# EAGLE board master (EAGLE 8.4.0)
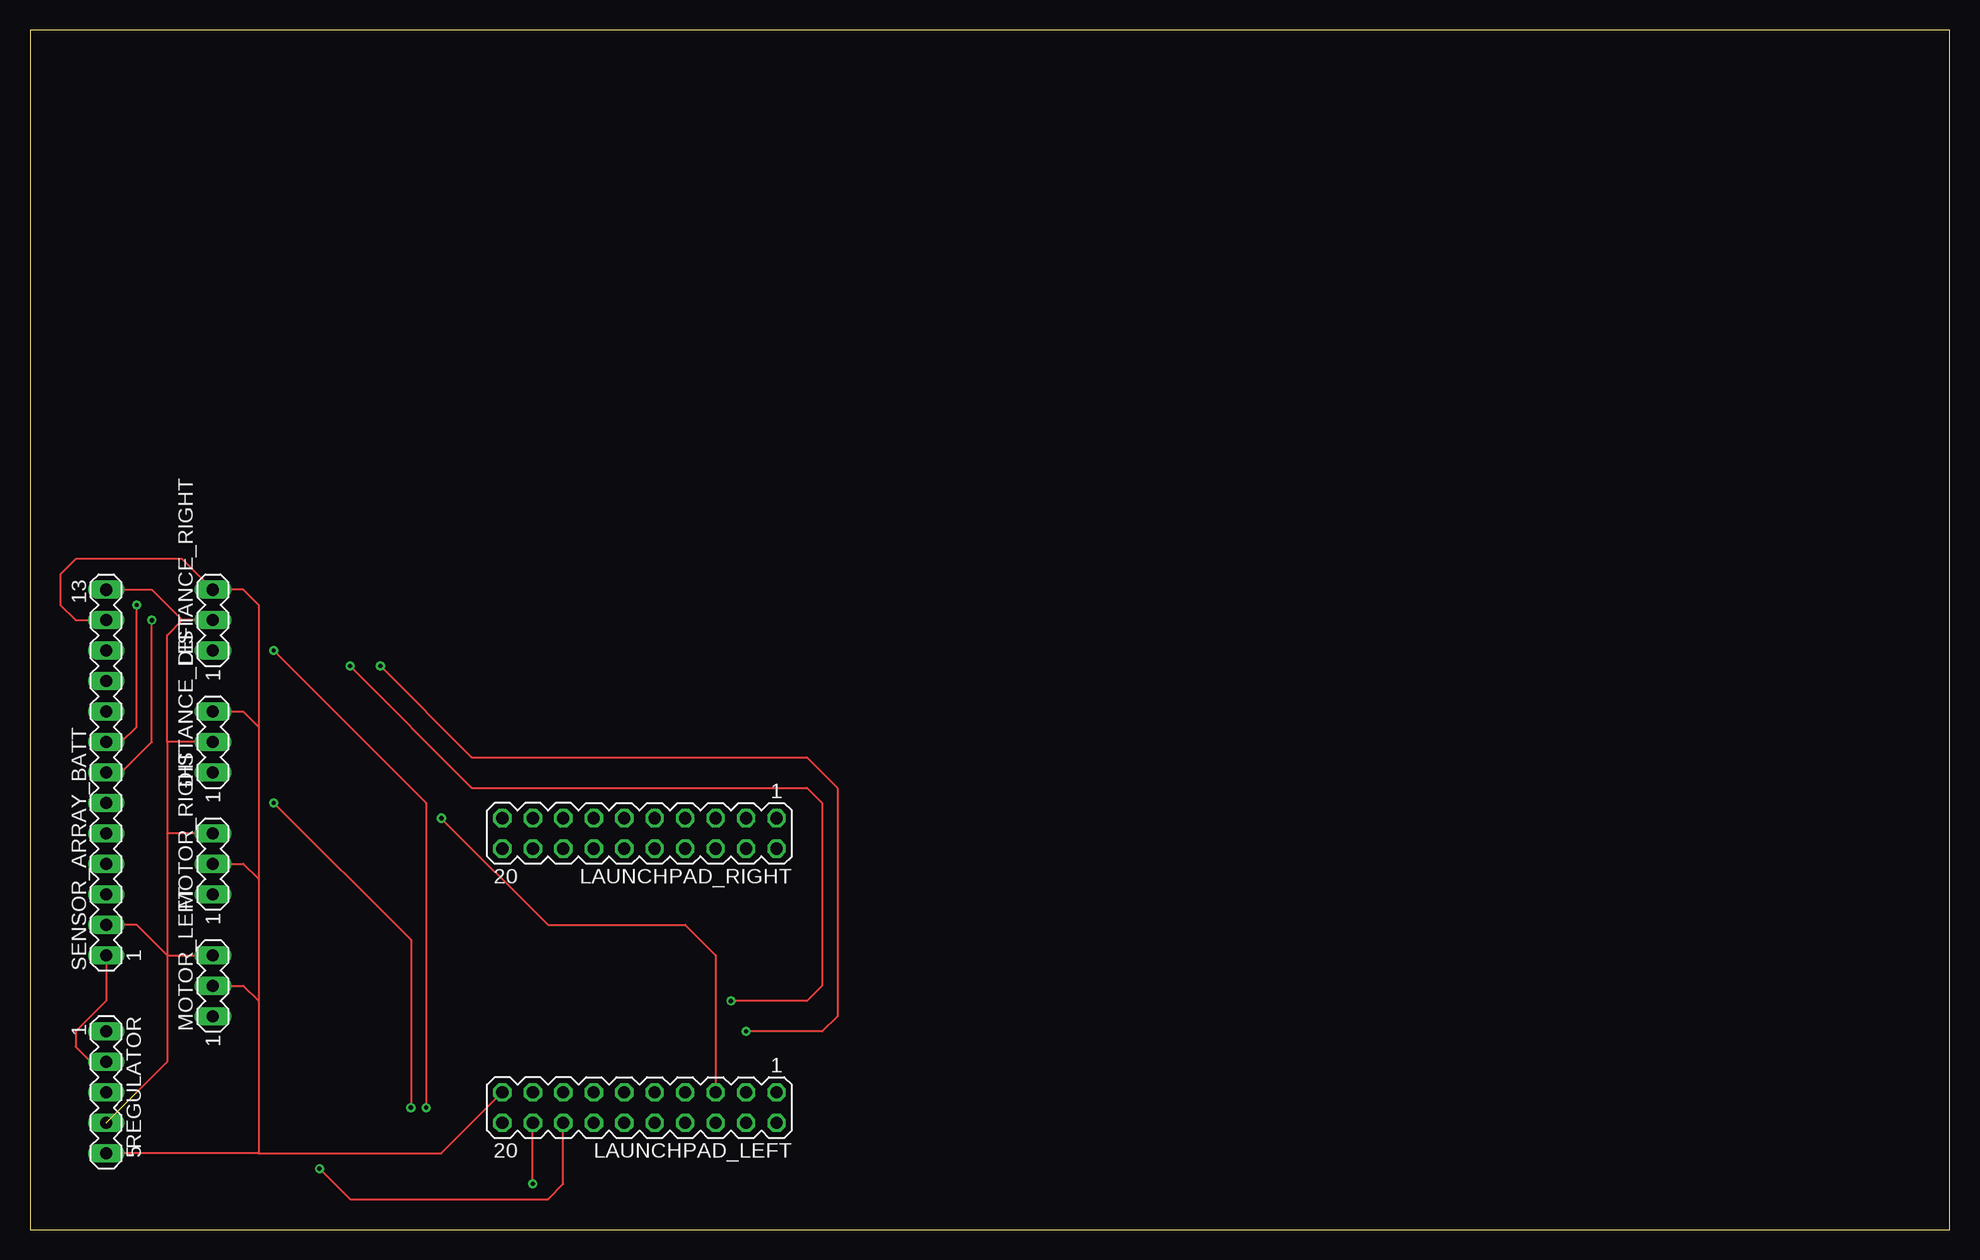
[diagram p0: board, top side]
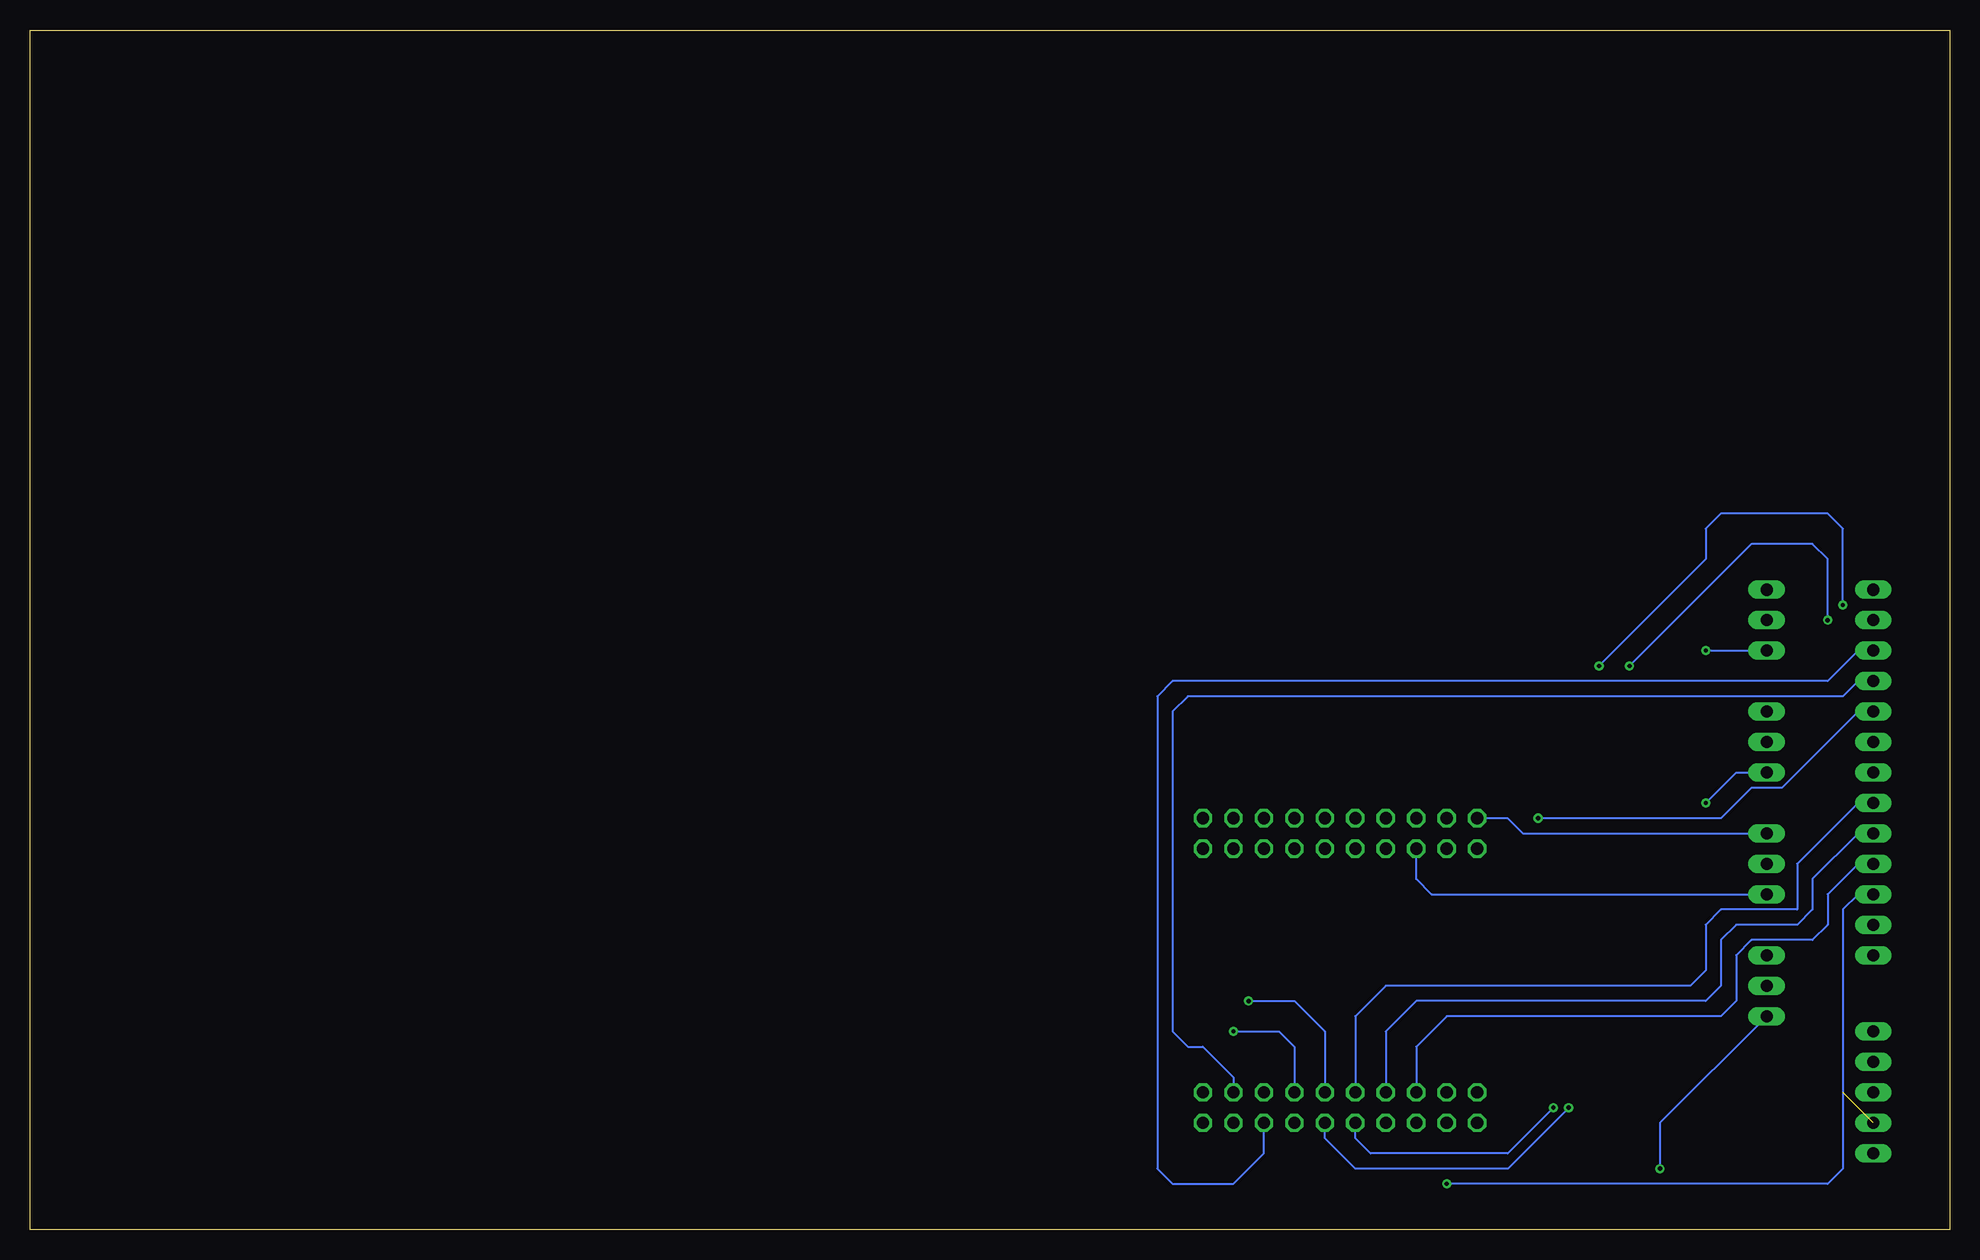
[diagram p1: board, bottom side, seen from below]

Size 160 x 100 mm. Coordinates in mm from the lower left corner, seen from the top.
Outline: 0,0 160,0 160,100 0,100 0,0
Copper layers (1*16): Top 0.035mm / dielectric 1.5mm / Bottom 0.035mm
Design rules "default": minimum track width 6mil, minimum drill 0.35mm, track to track 6mil, track to pad 6mil, pad to pad 6mil, via to via 6mil, smd to smd 6mil, copper to edge 40mil, drill to drill 6mil, minimum pad ring 10mil, minimum via ring 8mil, stop-mask expansion 4mil, vias tented up to drill 0mil, thermal gap 10mil

## Footprints (pad centres in the part's own frame; a part is rotated, then mirrored left to right if it is on the bottom)
MA03-1 = drill 1.016 long: 1 -2.54,0; 2 0,0; 3 2.54,0
MA10-2 = drill 1.016 octagon: 1 -11.43,-1.27; 2 -11.43,1.27; 3 -8.89,-1.27; 4 -8.89,1.27; 5 -6.35,-1.27; 6 -6.35,1.27; 7 -3.81,-1.27; 8 -3.81,1.27; 9 -1.27,-1.27; 10 -1.27,1.27; 11 1.27,-1.27; 12 1.27,1.27; 13 3.81,-1.27; 14 3.81,1.27; 15 6.35,-1.27; 16 6.35,1.27; 17 8.89,-1.27; 18 8.89,1.27; 19 11.43,-1.27; 20 11.43,1.27
MA05-1 = drill 1.016 long: 1 -5.08,0; 2 -2.54,0; 3 0,0; 4 2.54,0; 5 5.08,0
MA13-1 = drill 1.016 long: 1 -15.24,0; 2 -12.7,0; 3 -10.16,0; 4 -7.62,0; 5 -5.08,0; 6 -2.54,0; 7 0,0; 8 2.54,0; 9 5.08,0; 10 7.62,0; 11 10.16,0; 12 12.7,0; 13 15.24,0

## Placement (x,y rotation side)
DISTANCE_LEFT  [MA03-1]  15.24,40.64 90 top
DISTANCE_RIGHT  [MA03-1]  15.24,50.8 90 top
LAUNCHPAD_LEFT  [MA10-2]  50.8,10.16 180 top
LAUNCHPAD_RIGHT  [MA10-2]  50.8,33.02 180 top
MOTOR_LEFT  [MA03-1]  15.24,20.32 90 top
MOTOR_RIGHT  [MA03-1]  15.24,30.48 90 top
REGULATOR  [MA05-1]  6.35,11.43 270 top
SENSOR_ARRAY_BATT  [MA13-1]  6.35,38.1 90 top

## Library data of the parts
DISTANCE_LEFT DISTANCE_RIGHT LAUNCHPAD_LEFT LAUNCHPAD_RIGHT MOTOR_LEFT MOTOR_RIGHT REGULATOR = con-lstb; OC_FARNELL: unknown; OC_NEWARK: unknown
SENSOR_ARRAY_BATT = con-lstb; OC_FARNELL: unknown; OC_NEWARK: unknown; SPICEPREFIX: X

## Nets
+3.3V: LAUNCHPAD_LEFT.20
A2: LAUNCHPAD_RIGHT.1
A3: LAUNCHPAD_RIGHT.3
A4: LAUNCHPAD_RIGHT.5
A5: LAUNCHPAD_LEFT.6 SENSOR_ARRAY_BATT.11
A6: LAUNCHPAD_LEFT.4
A7: LAUNCHPAD_LEFT.2
B0: LAUNCHPAD_LEFT.16 MOTOR_LEFT.1
B1: LAUNCHPAD_LEFT.14
B2: LAUNCHPAD_RIGHT.17
B3: LAUNCHPAD_RIGHT.16 MOTOR_RIGHT.1
B4: LAUNCHPAD_LEFT.8
B5: LAUNCHPAD_LEFT.18 SENSOR_ARRAY_BATT.3
B6: LAUNCHPAD_RIGHT.7
B7: LAUNCHPAD_RIGHT.9
BLUE_LED: LAUNCHPAD_RIGHT.20
C4: LAUNCHPAD_RIGHT.14
C5: LAUNCHPAD_RIGHT.12
C6: LAUNCHPAD_RIGHT.10
C7: LAUNCHPAD_RIGHT.8
D0: LAUNCHPAD_LEFT.15 SENSOR_ARRAY_BATT.4
D1: LAUNCHPAD_LEFT.13 SENSOR_ARRAY_BATT.5
D2: LAUNCHPAD_LEFT.11 SENSOR_ARRAY_BATT.6
D3: LAUNCHPAD_LEFT.9 SENSOR_ARRAY_BATT.7
D6: LAUNCHPAD_RIGHT.6
DETECTION: LAUNCHPAD_RIGHT.4
E0: LAUNCHPAD_RIGHT.15
E1: LAUNCHPAD_LEFT.7 SENSOR_ARRAY_BATT.8
E2: LAUNCHPAD_LEFT.5 SENSOR_ARRAY_BATT.9
E3: LAUNCHPAD_LEFT.3 SENSOR_ARRAY_BATT.10
E4: DISTANCE_RIGHT.1 LAUNCHPAD_LEFT.12
E5: DISTANCE_LEFT.1 LAUNCHPAD_LEFT.10
EN: REGULATOR.1
GND: DISTANCE_LEFT.2 DISTANCE_RIGHT.2 LAUNCHPAD_RIGHT.19 MOTOR_LEFT.3 MOTOR_RIGHT.3 REGULATOR.4 SENSOR_ARRAY_BATT.2 SENSOR_ARRAY_BATT.13
GREEN_LED: LAUNCHPAD_RIGHT.18
PUSH1: LAUNCHPAD_RIGHT.2
PUSH2: LAUNCHPAD_RIGHT.13
RED_LED: LAUNCHPAD_LEFT.1
RESET: LAUNCHPAD_RIGHT.11
VBUS: DISTANCE_LEFT.3 DISTANCE_RIGHT.3 LAUNCHPAD_LEFT.19 MOTOR_LEFT.2 MOTOR_RIGHT.2 REGULATOR.5 SENSOR_ARRAY_BATT.12
VCC: REGULATOR.2 SENSOR_ARRAY_BATT.1

## Tracks (layer width: path | path; a pad name or v marks a point on that pad's centre or on a via)
A5
  Bottom 0.152: SENSOR_ARRAY_BATT.11 7.62,48.26 10.16,45.72 64.77,45.72 66.04,44.45 66.04,5.08 64.77,3.81 59.69,3.81 57.15,6.35 LAUNCHPAD_LEFT.6
B0  (via drill 0.35)
  Top 0.152: v24.13,5.08 26.67,2.54 43.18,2.54 44.45,3.81 LAUNCHPAD_LEFT.16
  Bottom 0.152: MOTOR_LEFT.1 24.13,8.89 v24.13,5.08
B3
  Bottom 0.152: LAUNCHPAD_RIGHT.16 44.45,29.21 43.18,27.94 MOTOR_RIGHT.1
B5  (via drill 0.35)
  Top 0.152: v41.91,3.81 LAUNCHPAD_LEFT.18
  Bottom 0.152: v41.91,3.81 10.16,3.81 8.89,5.08 8.89,26.67 7.62,27.94 SENSOR_ARRAY_BATT.3
D0
  Bottom 0.152: SENSOR_ARRAY_BATT.4 7.62,30.48 10.16,27.94 10.16,25.4 11.43,24.13 16.51,24.13 17.78,22.86 17.78,19.05 19.05,17.78 41.91,17.78 44.45,15.24 LAUNCHPAD_LEFT.15
D1
  Bottom 0.152: SENSOR_ARRAY_BATT.5 7.62,33.02 11.43,29.21 11.43,26.67 12.7,25.4 17.78,25.4 19.05,24.13 19.05,20.32 20.32,19.05 44.45,19.05 46.99,16.51 LAUNCHPAD_LEFT.13
D2
  Bottom 0.152: SENSOR_ARRAY_BATT.6 7.62,35.56 12.7,30.48 12.7,26.67 19.05,26.67 20.32,25.4 20.32,21.59 21.59,20.32 46.99,20.32 49.53,17.78 LAUNCHPAD_LEFT.11
D3  (via drill 0.35)
  Top 0.152: SENSOR_ARRAY_BATT.7 7.62,38.1 10.16,40.64 v10.16,50.8 | v26.67,46.99 36.83,36.83 64.77,36.83 66.04,35.56 66.04,20.32 64.77,19.05 v58.42,19.05
  Bottom 0.152: v10.16,50.8 10.16,55.88 11.43,57.15 16.51,57.15 v26.67,46.99 | v58.42,19.05 54.61,19.05 52.07,16.51 LAUNCHPAD_LEFT.9
E1  (via drill 0.35)
  Top 0.152: SENSOR_ARRAY_BATT.8 7.62,40.64 8.89,41.91 v8.89,52.07 | v59.69,16.51 66.04,16.51 67.31,17.78 67.31,36.83 64.77,39.37 36.83,39.37 v29.21,46.99
  Bottom 0.152: v29.21,46.99 20.32,55.88 20.32,58.42 19.05,59.69 10.16,59.69 8.89,58.42 v8.89,52.07 | v59.69,16.51 55.88,16.51 54.61,15.24 LAUNCHPAD_LEFT.7
E2  (via drill 0.35)
  Top 0.152: v34.29,34.29 43.18,25.4 54.61,25.4 57.15,22.86 LAUNCHPAD_LEFT.5
  Bottom 0.152: SENSOR_ARRAY_BATT.9 7.62,43.18 13.97,36.83 16.51,36.83 19.05,34.29 v34.29,34.29
E3
  Bottom 0.152: SENSOR_ARRAY_BATT.10 7.62,45.72 8.89,44.45 63.5,44.45 64.77,43.18 64.77,16.51 63.5,15.24 62.23,15.24 59.69,12.7 LAUNCHPAD_LEFT.3
E4  (via drill 0.35)
  Top 0.152: v20.32,48.26 33.02,35.56 v33.02,10.16
  Bottom 0.152: LAUNCHPAD_LEFT.12 49.53,7.62 48.26,6.35 36.83,6.35 v33.02,10.16 | v20.32,48.26 DISTANCE_RIGHT.1
E5  (via drill 0.35)
  Top 0.152: v20.32,35.56 31.75,24.13 v31.75,10.16
  Bottom 0.152: v20.32,35.56 17.78,38.1 DISTANCE_LEFT.1 | v31.75,10.16 36.83,5.08 49.53,5.08 52.07,7.62 LAUNCHPAD_LEFT.10
GND  (1 unrouted)
  Top 0.152: SENSOR_ARRAY_BATT.2 8.89,25.4 11.43,22.86 | 11.43,22.86 MOTOR_LEFT.3 | DISTANCE_RIGHT.2 12.7,50.8 | SENSOR_ARRAY_BATT.13 10.16,53.34 12.7,50.8 | 12.7,50.8 11.43,49.53 11.43,40.64 | 11.43,40.64 11.43,33.02 | 11.43,33.02 11.43,22.86 | MOTOR_RIGHT.3 11.43,33.02 | DISTANCE_LEFT.2 11.43,40.64 | 11.43,22.86 11.43,13.97 8.89,11.43
  Bottom 0.152: LAUNCHPAD_RIGHT.19 36.83,34.29 35.56,33.02 MOTOR_RIGHT.3
VBUS
  Top 0.152: 19.05,6.35 REGULATOR.5 | 19.05,6.35 34.29,6.35 LAUNCHPAD_LEFT.19 | MOTOR_LEFT.2 17.78,20.32 19.05,19.05 | 19.05,19.05 19.05,6.35 | MOTOR_RIGHT.2 17.78,30.48 19.05,29.21 | 19.05,29.21 19.05,19.05 | DISTANCE_LEFT.3 17.78,43.18 19.05,41.91 | 19.05,41.91 19.05,29.21 | 19.05,41.91 19.05,52.07 17.78,53.34 DISTANCE_RIGHT.3 12.7,55.88 3.81,55.88 2.54,54.61 2.54,52.07 3.81,50.8 SENSOR_ARRAY_BATT.12
VCC
  Top 0.152: SENSOR_ARRAY_BATT.1 6.35,19.05 3.81,16.51 3.81,15.24 5.08,13.97 REGULATOR.2